# EAGLE board Box-3 Electronics v11 (EAGLE 9.7.0)
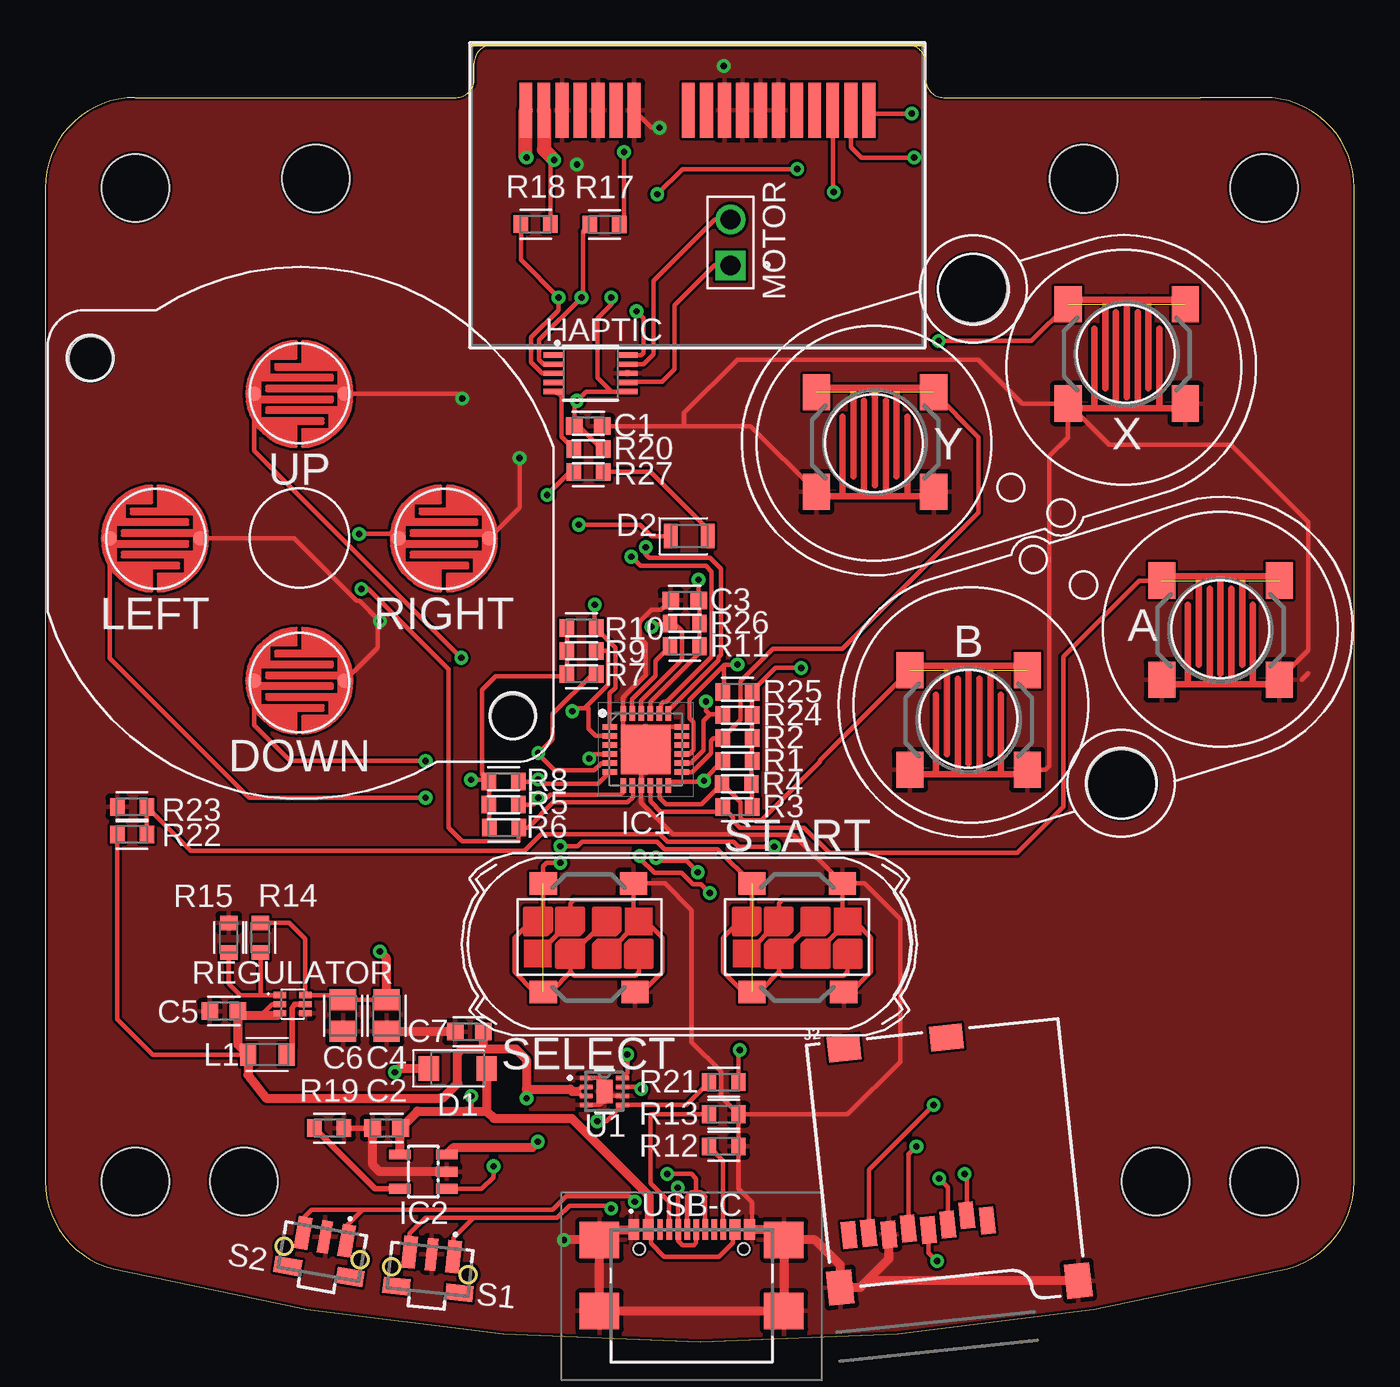
[diagram p0: board, top side]
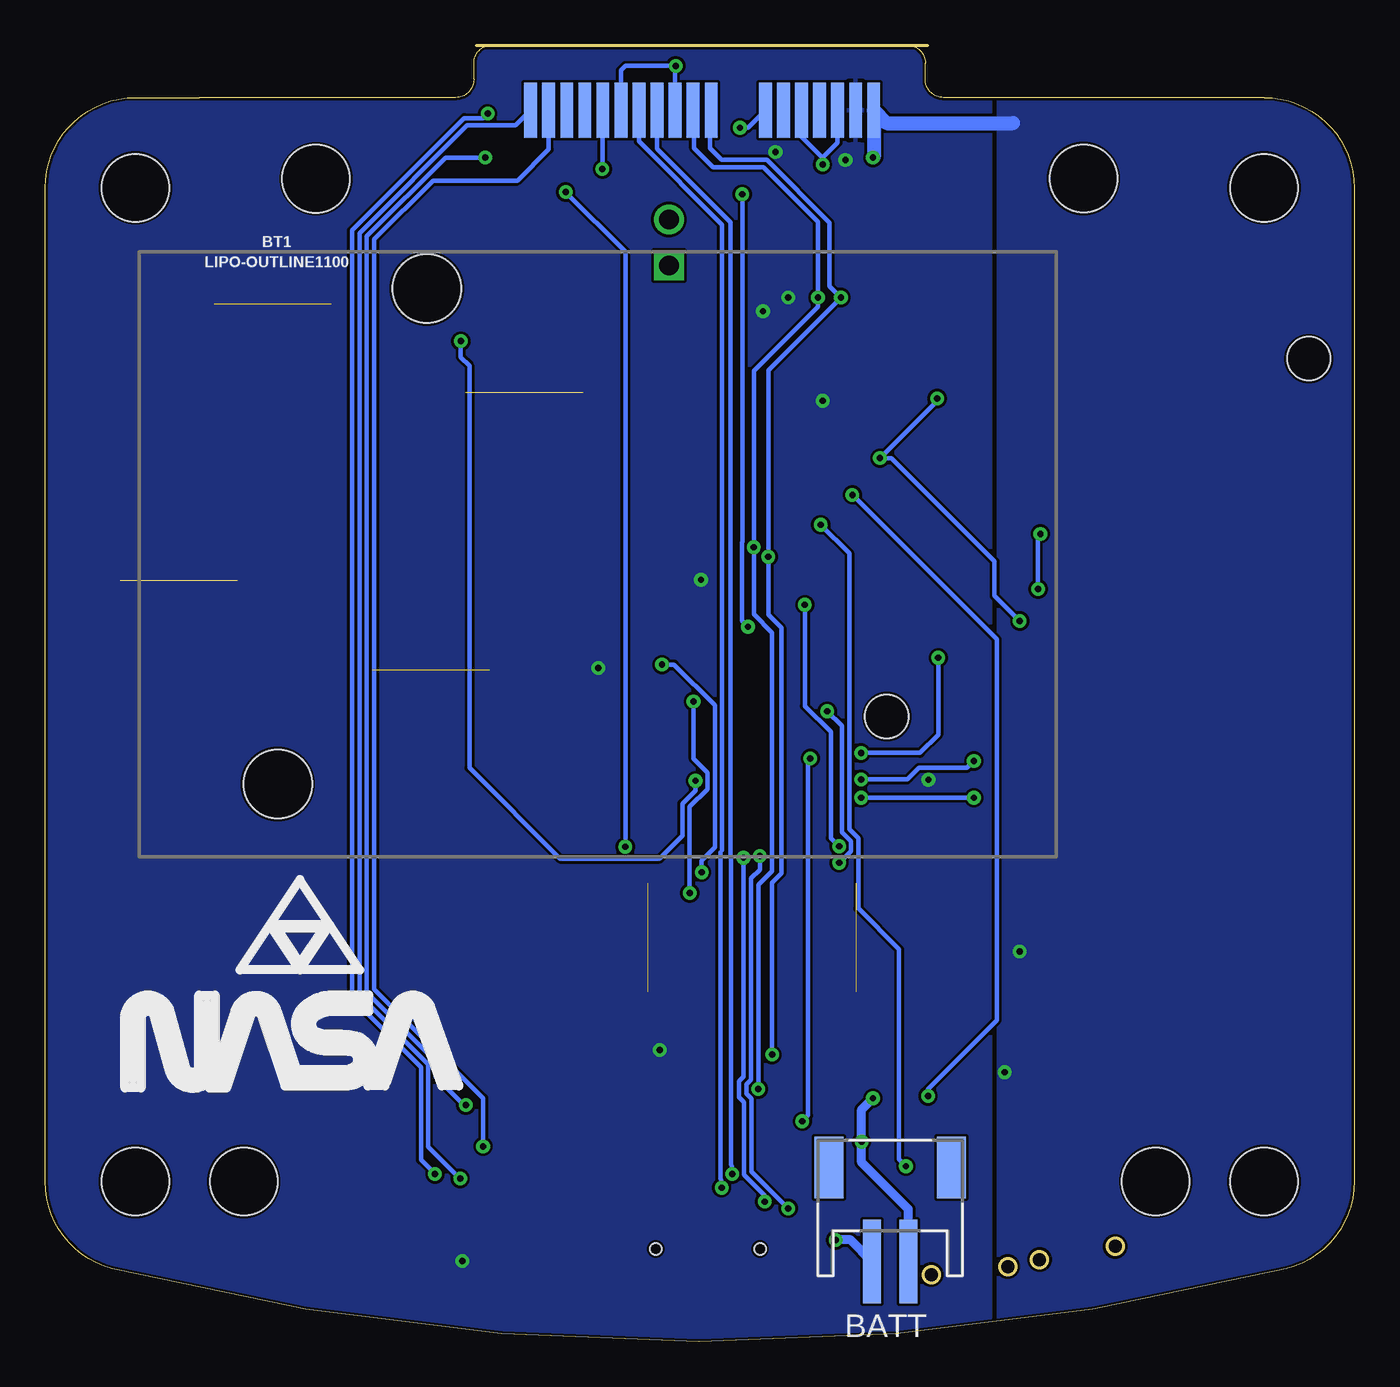
[diagram p1: board, bottom side, seen from below]

Size 72.5 x 71.78 mm. Coordinates in mm from the lower left corner, seen from the top.
Outline: 22.76,68.88 arc90 23.76,69.88 23.76,70.78 arc-90 24.76,71.78 47.88,71.78 arc-83 48.76,70.78 48.76,69.88 arc90 49.76,68.88 63.96,68.88
Outline: 22.76,68.88 5,68.88 arc90 0,63.88 0,8.89 arc76 3.78,4.04 arc28 68.8,4.05 arc75 72.5,8.88 72.5,63.88 arc90 67.5,68.88 63.96,68.88
Outline: 22.76,68.88 22.76,68.88
Outline: 63.96,68.88 63.96,68.88
Outline: circle at 19.2,4.16 radius 0.45
Outline: circle at 23.42,3.72 radius 0.45
Outline: circle at 17.43,4.55 radius 0.45
Outline: circle at 13.25,5.28 radius 0.45
Copper layers (1*16): Top 0.035mm / dielectric 1.5mm / Bottom 0.035mm
Design rules "default *": minimum track width 6mil, minimum drill 0.35mm, track to track 6mil, track to pad 5mil, pad to pad 5mil, via to via 6mil, smd to smd 5mil, copper to edge 6mil, drill to drill 6mil, minimum pad ring 10mil, minimum via ring 8mil, stop-mask expansion 4mil, vias tented up to drill 0mil, thermal gap 10mil
Holes 3.75 mm at 5,63.88 15,64.4 57.5,64.38 67.5,63.87 67.5,8.87 61.5,8.88 5,8.88 11,8.88

## Footprints (pad centres in the part's own frame; a part is rotated, then mirrored left to right if it is on the bottom)
DMG_BTN3 = smd 1.5 x 2: P$1 -3.25,2.75; P$2 -3.25,-2.75; P$3 3.25,2.75; P$4 3.25,-2.75
JSTPH2 = smd 1 x 4.6: 1 -1,-3.7; 2 1,-3.7 | smd 1.6 x 3.4: NC1 -3.4,1.5; NC2 3.4,1.5
CAPC1608X85 = smd 0.921 x 0.97: 1 -0.775,0; 2 0.775,0
CAPC2012X110 = smd 1.165 x 1.465: 1 -0.875,0; 2 0.875,0
SODFL3718X115 = smd 1.115 x 1.361: 1 -1.6,0; 2 1.6,0
LEDC2012X110N_FLAT-R = smd 0.762 x 1.362: A 1.025,0; C -1.025,0
BUTTON-CONDUCTIVE_6MM_2 = smd 0.8 x 0.8: 1 -2.5,0; 2 2.5,0
VSSOP-10 = smd 1.1 x 0.3: 1 -2.05,1; 2 -2.05,0.5; 3 -2.05,0; 4 -2.05,-0.5; 5 -2.05,-1; 6 2.05,-1; 7 2.05,-0.5; 8 2.05,0; 9 2.05,0.5; 10 2.05,1
QFN50P400X400X80-25N = smd 0.8 x 0.3: 1 -2,1.25; 2 -2,0.75; 3 -2,0.25; 4 -2,-0.25; 5 -2,-0.75; 6 -2,-1.25; 13 2,-1.25; 14 2,-0.75; 15 2,-0.25; 16 2,0.25; 17 2,0.75; 18 2,1.25 | smd 0.3 x 0.8: 7 -1.25,-2; 8 -0.75,-2; 9 -0.25,-2; 10 0.25,-2; 11 0.75,-2; 12 1.25,-2; 19 1.25,2; 20 0.75,2; 21 0.25,2; 22 -0.25,2; 23 -0.75,2; 24 -1.25,2 | smd 2.75 x 2.75: 25 0,0
SOT23-5L = smd 0.55 x 1.2: 1 -0.95,-1.3; 2 0,-1.3; 3 0.95,-1.3; 4 0.95,1.3; 5 -0.95,1.3
CONN_5-1734857-1_TEC = smd 0.711 x 3.048: A1 -9.5,0; A2 -8.5,0; A3 -7.5,0; A4 -6.5,0; A5 -5.5,0; A6 -4.5,0; A7 -3.5,0; A8 -2.5,0; A9 -1.5,0; A10 -0.5,0; A11 0.5,0; A12 3.5,0; A13 4.5,0; A14 5.5,0; A15 6.5,0; A16 7.5,0; A17 8.5,0; A18 9.5,0 | smd 0.711 x 3.048 bottom: B1 -9.5,0; B2 -8.5,0; B3 -7.5,0; B4 -6.5,0; B5 -5.5,0; B6 -4.5,0; B7 -3.5,0; B8 -2.5,0; B9 -1.5,0; B10 -0.5,0; B11 0.5,0; B12 3.5,0; B13 4.5,0; B14 5.5,0; B15 6.5,0; B16 7.5,0; B17 8.5,0; B18 9.5,0
MICRO-SD-SOCKET = smd 1.8 x 1.4: CD1 -2.05,0.4; CD2 -7.75,0.4 | smd 0.8 x 1.5: CS -7.84,10.3; DI -6.74,10.7; DO -2.34,10.7; GND -3.44,10.9; RSV1 -8.94,10.7; RSV2 -1.24,10.7; SCLK -4.54,10.7; VCC -5.64,10.9 | smd 1.4 x 1.9: GND1 -13.6,14.55; GND3 -0.45,13.55
INDC2009X120 = smd 0.876 x 1.21: 1 -1.067,0; 2 1.067,0
61300211121 = drill 1.1 square: 1 -1.27,0 | drill 1.1: 2 1.27,0
RESC1608X60 = smd 0.799 x 0.974: 1 -0.815,0; 2 0.815,0
SOT563 = smd 0.7 x 0.35: 1 -0.7,0.5; 2 -0.7,0; 3 -0.7,-0.5; 4 0.7,-0.5; 5 0.7,0; 6 0.7,0.5
TL3340 = smd 0.75 x 1.8: 1 1.225,2.1; 3 -1.225,2.1 | smd 0.6 x 1.8: 2 0,2.1 | smd 1.5 x 0.9: 4 -1.75,0.15; 5 1.75,0.15 | hole 0.9: 2.125,1.2; -2.125,1.2
DMG_BTN1_W2 = smd 1.25 x 1.5: P$1 -3,2.5; P$2 -3,-2.58; P$3 3,2.5; P$4 3,-2.5
21-0168E_T822-3_MXM = smd 0.711 x 0.254: 1 -1.003,0.75; 2 -1.003,0.25; 3 -1.003,-0.25; 4 -1.003,-0.75; 5 1.003,-0.75; 6 1.003,-0.25; 7 1.003,0.25; 8 1.003,0.75 | smd 0.889 x 1.295: 9 0,0
GAMEBOY_COLOR_DPAD_SILK = hole 2.413: -11.557,9.83; 11.811,-9.982
GAMEBOY_COLOR_A/B_BUTTON_MEMBRANE = hole 3.81: 1.524,-6.096
USB4110GFA = smd 0.3 x 1.15: A1 -3.35,3.678; A4 -2.55,3.678; A5 -1.25,3.678; A6 -0.25,3.678; A7 0.25,3.678; A8 1.25,3.678; A9 2.55,3.678; A12 3.35,3.678; B1 3.05,3.678; B4 2.25,3.678; B5 1.75,3.678; B6 0.75,3.678; B7 -0.75,3.678; B8 -1.75,3.678; B9 -2.25,3.678; B12 -3.05,3.678 | smd 2.18 x 2: MP1 -5.11,-0.827; MP2 5.11,-0.827; MP3 -5.11,3.103; MP4 5.11,3.103 | hole 0.65: -2.89,2.603; 2.89,2.603

## Placement (x,y rotation side)
A  SWITCH_MOMENTARYDMG-BTN-A/B  [DMG_BTN3]  65.08,39.39 0 top
B  SWITCH_MOMENTARYDMG-BTN-A/B  [DMG_BTN3]  51.14,34.41 0 top
BATT  JSTPH2  [JSTPH2]  25.7,8.14 0 bottom
BT1  LIPO-OUTLINE1100  [LIPO-1000]  67.3,60.34 270 bottom
C1  .1uF  [CAPC1608X85]  30.09,50.69 0 top
C2  10uF  [CAPC1608X85]  18.91,11.83 180 top
C3  .1uF  [CAPC1608X85]  35.42,41.04 180 top
C4  22uF  [CAPC2012X110]  18.91,18.05 270 top
C5  10uF  [CAPC1608X85]  9.89,18.31 180 top
C6  22uF  [CAPC2012X110]  16.5,18.05 270 top
C7  .1uF  [CAPC1608X85]  23.48,17.16 0 top
D1  MBR0520LT1G  [SODFL3718X115]  22.85,15.13 0 top
D2  LED_RED  [LEDC2012X110N_FLAT-R]  35.67,44.6 0 top
DOWN  SWITCH_MOMENTARYCONTACTIVE_6MM_2  [BUTTON-CONDUCTIVE_6MM_2]  14.08,36.59 0 top
HAPTIC  DRV2605L  [VSSOP-10]  30.21,53.61 0 top
IC1  AW9523BTQR  [QFN50P400X400X80-25N]  33.26,32.78 0 top
IC2  MCP73831/OT  [SOT23-5L]  20.94,9.42 90 top
J1  5-1734857-1CONN_5-1734857-1_TEC  [CONN_5-1734857-1_TEC]  36.12,68.17 180 top
J2  MICRO-SD_CARD_SOCKET  [MICRO-SD-SOCKET]  42.16,16.43 186 top
L1  1uH  [INDC2009X120]  12.3,15.89 0 top
LEFT  SWITCH_MOMENTARYCONTACTIVE_6MM_2  [BUTTON-CONDUCTIVE_6MM_2]  6.08,44.47 0 top
MOTOR  61300211121  [61300211121]  37.96,60.85 90 top
R1  10k  [RESC1608X60]  38.34,32.15 0 top
R2  10k  [RESC1608X60]  38.34,33.42 0 top
R3  10k  [RESC1608X60]  38.34,29.61 0 top
R4  10k  [RESC1608X60]  38.3,30.88 0 top
R5  10k  [RESC1608X60]  25.39,29.74 180 top
R6  10k  [RESC1608X60]  25.41,28.47 180 top
R7  10k  [RESC1608X60]  29.7,36.98 180 top
R8  10k  [RESC1608X60]  25.39,31.01 180 top
R9  10k  [RESC1608X60]  29.7,38.25 180 top
R10  10k  [RESC1608X60]  29.7,39.52 180 top
R11  10k  [RESC1608X60]  35.42,38.5 0 top
R12  5.1k  [RESC1608X60]  37.58,10.81 180 top
R13  5.1k  [RESC1608X60]  37.58,12.59 0 top
R14  732k  [RESC1608X60]  11.92,22.37 90 top
R15  100k  [RESC1608X60]  10.17,22.37 90 top
R17  1k  [RESC1608X60]  30.97,61.85 0 top
R18  1k  [RESC1608X60]  27.16,61.87 0 top
R19  2.0k  [RESC1608X60]  15.73,11.83 180 top
R20  10k  [RESC1608X60]  30.09,49.42 0 top
R21  10k  [RESC1608X60]  37.58,14.37 180 top
R22  10k  [RESC1608X60]  4.81,28.09 0 top
R23  10k  [RESC1608X60]  4.81,29.61 180 top
R24  10k  [RESC1608X60]  38.34,34.69 0 top
R25  10k  [RESC1608X60]  38.34,35.96 0 top
R26  10k  [RESC1608X60]  35.42,39.77 0 top
R27  5.1k  [RESC1608X60]  30.09,48.15 0 top
REGULATOR  TPS61070  [SOT563]  13.7,18.69 0 top
RIGHT  SWITCH_MOMENTARYCONTACTIVE_6MM_2  [BUTTON-CONDUCTIVE_6MM_2]  22.08,44.47 0 top
S1  TL3340AF160QG  [TL3340]  21.18,2.74 354 top
S2  TL3340AF160QG  [TL3340]  15.13,3.73 350 top
SELECT  SWITCH_MOMENTARYDMG-BTN-START/SELECT  [DMG_BTN1_W2]  30.09,22.37 90 top
START  SWITCH_MOMENTARYDMG-BTN-START/SELECT  [DMG_BTN1_W2]  41.64,22.37 90 top
U1  MAX17048G+T1021-0168E_T822-3_MXM  [21-0168E_T822-3_MXM]  30.97,13.86 0 top
U$1  SILKSCREENGBC_D-PAD  [GAMEBOY_COLOR_DPAD_SILK]  14.08,44.6 0 top
U$2  SILKSCREENGBC_START/SELECT  [GAMEBOY_COLOR_START_SELECT_SILK]  35.42,22.37 0 top
U$3  SILKSCREENGBC_A/B  [GAMEBOY_COLOR_A/B_BUTTON_MEMBRANE]  52.89,52.22 180 top
U$4  SILKSCREENGBC_A/B  [GAMEBOY_COLOR_A/B_BUTTON_MEMBRANE]  58.1,36.98 0 top
UP  SWITCH_MOMENTARYCONTACTIVE_6MM_2  [BUTTON-CONDUCTIVE_6MM_2]  14.08,52.47 0 top
USB-C  629722000214  [USB4110GFA]  35.8,2.53 0 top
X  SWITCH_MOMENTARYDMG-BTN-A/B  [DMG_BTN3]  59.9,54.69 0 top
Y  SWITCH_MOMENTARYDMG-BTN-A/B  [DMG_BTN3]  45.95,49.8 0 top

## Library data of the parts
A B DOWN LEFT RIGHT SELECT START U$1-U$4 UP X Y = Inputs
BATT = Tutorial - Fusion 360
BT1 = SparkFun-Batteries; PROD_ID: BATT-13243; SF_SKU: PRT-13813
C1-C3 C5 C7 = Capacitor; CATEGORY: Capacitor
C4 C6 = Capacitor; CATEGORY: Capacitor; MOUSER: https://www.mouser.com/ProductDetail/Samsung-Electro-Mechanics/CL21A226MQQNNNF?qs=sGAEpiMZZMs7ZEmUmaUL0wnmEc5iLKHP2isAklsGkAs%3D
D1 = Diode; CATEGORY: Diode; DESCRIPTION: DIODE SCHOTTKY 20V 500MA SOD123; MANUFACTURER: ON Semiconductor; MPN: MBR0520LT1G; SUB-CATEGORY: Schottky
D2 = LED; CATEGORY: LED; COLOR: RED; DESCRIPTION: CHIP LED FLAT; MANUFACTURER: Wurth Electronik; MOUSER: https://www.mouser.com/ProductDetail/Wurth-Elektronik/150080RS75000?qs=LlUlMxKIyB2jdCo7bnfgew%3D%3D; MPN: 150080RS75000; SUB-CATEGORY: CHIP; TYPE: FLAT_TOP
HAPTIC = SparkFun-IC-Special-Function; PROD_ID: IC-13504
IC1 = ICs; DESCRIPTION: 16 MULTI-FUNCTION LED DRIVER AND GPIO CONTROLLER WITH I2C INTERFACE; HEIGHT: 0.8mm; MANUFACTURER_NAME: AWINIC; MANUFACTURER_PART_NUMBER: AW9523BTQR
IC2 = ICs
J1 = Library; COPYRIGHT: Copyright (C) 2023 Ultra Librarian. All rights reserved.; MANUFACTURER_PART_NUMBER: 5-1734857-1; MFR_NAME: TE Connectivity
J2 = SparkFun-Connectors; PROD_ID: CONN-07820; SF_ID: PRT-00127
L1 = Inductor; CATEGORY: Inductor; MOUSER: https://www.mouser.com/ProductDetail/TDK/MLZ2012A1R0WT000?qs=%2FPzWLGNeQ%252BjNsoWh9l1QhQ%3D%3D; SUB-CATEGORY: Fixed
MOTOR = Headers; CREATED_BY: PCBLayout.com; DIGI_KEY_PART_NUMBER: 732-5315-ND; MANUFACTURER: Wurth Electronics Inc.; MPN: 61300211121
R1-R15 R17-R27 = Tutorial - Fusion 360; CATEGORY: Resistor; SUB-CATEGORY: Fixed
REGULATOR = Library
S1 S2 = Library; DESCRIPTION: E-SWITCH - TL3340AF160QG. - SWITCH, TACTILE SPST 50mA, SMD GULL WING; HEIGHT: mm; MANUFACTURER_NAME: E-Switch; MANUFACTURER_PART_NUMBER: TL3340AF160QG; MOUSER_PART_NUMBER: 612-TL3340AF160QG; MOUSER_PRICE-STOCK: https://www.mouser.co.uk/ProductDetail/E-Switch/TL3340AF160QG?qs=Cv1v43EOJpo402rrfE5MlQ%3D%3D
U1 = ICs; COPYRIGHT: Copyright (C) 2023 Ultra Librarian. All rights reserved.; MANUFACTURER_PART_NUMBER: MAX17048G+T10; MFR_NAME: Analog Devices / Maxim Integrated
USB-C = Wurth_Connectors_WR-USB

## Nets
3V3: C1.1 C3.1 HAPTIC.6 HAPTIC.10 IC1.21 J1.A17 J1.B17 J2.VCC R1.2 R2.2 R3.2 R4.2 R5.2 R6.2 R7.2 R8.2 R9.2 R10.2 R11.2 R17.2 R18.2 R20.2 R21.1 R24.2 R25.2 R26.2
5V: C4.1 C6.1 D1.1 J1.A18 J1.B18 R14.2 REGULATOR.6
!BAT_ALERT: IC1.4 R21.2 U1.5
A: A.P$1 A.P$3 IC1.10 R3.1
B: B.P$1 B.P$3 IC1.11 R4.1
CLK: J1.B2 J2.SCLK
CS: J1.A1 J2.CS
DOWN: DOWN.1 IC1.6 R8.1
GND: A.P$2 A.P$4 B.P$2 B.P$4 BATT.1 C1.2 C2.2 C3.2 C4.2 C5.2 C6.2 C7.1 DOWN.2 HAPTIC.8 IC1.9 IC1.18 IC1.24 IC1.25 IC2.2 J1.A6 J1.A7 J1.A8 J1.A9 J1.A12 J1.A14 J1.A16 J1.B6 J1.B9 J1.B12 J1.B14 J1.B16 J2.GND J2.GND1 J2.GND3 LEFT.2 R12.1 R13.2 R15.2 R19.1 R23.2 REGULATOR.4 RIGHT.2 S1.2 S2.2 SELECT.P$2 SELECT.P$4 START.P$2 START.P$4 U1.1 U1.4 U1.6 U1.9 UP.2 USB-C.A1 USB-C.A12 USB-C.B1 USB-C.B12 USB-C.MP1 USB-C.MP2 USB-C.MP3 USB-C.MP4 X.P$2 X.P$4 Y.P$2 Y.P$4
GPIO_INTN: IC1.22 J1.B5 R26.1
IO9: J1.A4
IO38: J1.A11
IO39: J1.A10
IO42: J1.A5
IO43: J1.B3
IO44: J1.B4
LEFT: IC1.7 LEFT.1 R5.1
M+: HAPTIC.7 MOTOR.1
M-: HAPTIC.9 MOTOR.2
N$32: J1.A13
N$33: J1.B13
N$36: J1.A15
N$37: J1.B15
N$81: R12.2 USB-C.B5
N$82: R13.1 USB-C.A5
N$83: R14.1 R15.1 REGULATOR.1
N$84: L1.2 REGULATOR.5
N$85: IC2.5 R19.2
N$86: HAPTIC.5 R20.1
N$87: IC1.23 R11.1
N$88: D2.A R27.2
RIGHT: IC1.8 R6.1 RIGHT.1
SCK: HAPTIC.2 IC1.19 J1.B10 R17.1 U1.7
SDA: HAPTIC.3 IC1.20 J1.B11 R18.1 U1.8
SELECT: IC1.2 R9.1 SELECT.P$1 SELECT.P$3
SI: J1.B1 J2.DI
SO: J1.A2 J2.DO
START: IC1.1 R10.1 START.P$1 START.P$3
STAT2: D2.C IC2.1
UP: IC1.5 R7.1 UP.1
USB_D+: J1.B8 USB-C.A6 USB-C.B6
USB_D-: J1.B7 USB-C.A7 USB-C.B7
VBAT: BATT.2 C5.1 C7.2 IC2.3 L1.1 R22.1 REGULATOR.2 REGULATOR.3 U1.2 U1.3
VBAT_SENSE: J1.A3 R22.2 R23.1
VBUS: C2.1 D1.2 IC2.4 R27.1 USB-C.A4 USB-C.A9 USB-C.B4 USB-C.B9
VOLUME_DOWN: IC1.15 R25.1 S2.1 S2.3
VOLUME_UP: IC1.14 R24.1 S1.1 S1.3
X: IC1.12 R1.1 X.P$1 X.P$3
Y: IC1.13 R2.1 Y.P$1 Y.P$3

## Tracks (layer width: path | path; a pad name or v marks a point on that pad's centre or on a via)
3V3  (via drill 0.35)
  Top 0.254: R18.2 27.98,65.22 v28.18,65.42 | v49.39,4.46 48.91,4.94 J2.VCC | IC1.21 33.51,35.42 36.17,38.08 36.17,38.44 R11.2 R26.2 36.23,41 C3.1 36.18,41.05 v36.18,42.18 | R6.2 24.59,29.13 24.57,29.15 R5.2 R8.2 | R8.2 24.19,31.39 24.19,36.09 24.95,36.85 28.76,36.85 R7.2 R9.2 R10.2 | R3.2 39.16,30.84 R4.2 39.11,32.11 R1.2 R2.2 R24.2 R25.2 39.16,36.01 40.44,37.3 v41.87,37.3 | R8.2 24.47,31.11 v23.59,31.11 | R21.1 38.39,16.07 v38.47,16.15 | HAPTIC.6 32.23,52.58 31.74,52.58 31.37,52.58 | 31.37,52.58 30.59,53.36 30.59,56.66 31.35,57.42 v31.35,57.8 | HAPTIC.10 32.99,54.61 33.13,54.76 33.13,56.66 v32.75,57.04 | R20.2 30.83,49.42 29.55,50.69 C1.1 29.31,51.95 v29.45,52.09 29.94,52.58 31.37,52.58 | R17.2 32.05,62.11 v32.05,65.87
  Top 0.762: J1.B17 27.62,65.99 v28.18,65.42
  pour Bottom: 20.18,-1 73.27,-1 73.27,71.65 20.18,71.65
5V  (via drill 0.35)
  Top 0.254: R14.2 13.52,23.19 14.4,22.31 REGULATOR.6 16.46,19.19 C6.1 C4.1
  Top 0.508: C4.1 18.91,21.23 v18.53,21.61 | v19.37,14.92 19.59,15.13 D1.1
  Top 0.762: v26.66,65.55 26.62,65.59 J1.B18
  Bottom 0.762: 18.91,67.46 25.9,67.46 J1.B18 26.62,65.59 v26.66,65.55
  pour Bottom: -0.14,-1 19.67,-1 19.67,68.73 -0.14,68.73
!BAT_ALERT  (via drill 0.35)
  Top 0.254: IC1.4 30.37,32.53 v30.13,32.29 | R21.2 35.51,13.11 U1.5 31.08,12.21 v30.57,12.21
  Bottom 0.254: v30.13,32.29 30.25,32.29 30.25,12.53 v30.57,12.21
A  (1 unrouted)
  Top 0.254: IC1.10 33.51,29.92 34.09,29.34 37.52,29.34 R3.1 38.09,29.04 38.09,28.85 38.48,28.46 39.93,28.46 39.93,28.47 42.03,28.47 43.44,27.07 53.83,27.07 56.37,29.61 56.37,37.93 60.59,42.14 A.P$1
B  (1 unrouted)
  Top 0.254: IC1.11 34.01,30.12 34.38,29.75 36.35,29.75 R4.1 38.01,30.35 38.03,30.35 38.5,29.88 38.5,29.02 38.65,28.87 39.66,28.87 42.91,32.12 42.91,32.19 B.P$1
CLK  (via drill 0.35)
  Top 0.254: v48.25,10.81 47.8,10.37 J2.SCLK
  Bottom 0.254: v48.25,10.81 48.25,13.48 54.28,19.52 54.28,61.02 51.03,64.28 46.34,64.28 44.62,66.01 J1.B2
CS  (via drill 0.35)
  Top 0.254: v50.91,9.29 51.04,9.16 J2.CS | v47.99,67.99 45.8,67.99 J1.A1
  Bottom 0.254: v50.91,9.29 51.69,10.07 51.69,15.2 55.5,19.01 55.5,61.53 49.3,67.73 48.24,67.73 v47.99,67.99
DOWN  (via drill 0.35)
  Top 0.254: 27.42,31.13 27.29,31.01 R8.1 | 27.42,31.13 27.67,30.88 30.62,30.88 30.62,30.9 IC1.6 | DOWN.1 11.58,34.14 13.57,32.15 v21.07,32.15 | 27.42,31.13 v27.32,31.13
  Bottom 0.254: v21.07,32.15 21.45,31.77 24.12,31.77 24.75,31.13 v27.32,31.13
GND  (via drill 0.35)
  Top 0.254: J1.B6 | v34.02,67.2 33.59,67.2 J1.B12 | R13.2 R12.1 38.39,8.47 39.15,7.72 USB-C.A12 | v26.27,48.91 26.27,46.16 RIGHT.2 | v23.1,52.22 22.85,52.47 UP.2 | DOWN.2 18.4,38.41 18.4,39.77 v18.53,39.9 17.41,41.02 17.24,41.02 13.79,44.47 LEFT.2 | IC1.18 34.51,34.03 IC1.25 | IC1.25 32.01,34.03 IC1.24 32.01,35.67 33.25,36.91 33.25,38.67 32.92,39 32.92,39.85 33.58,40.51 34.12,40.51 C3.2 | IC1.25 33.01,32.53 IC1.9 33.01,29.84 34.77,28.09 38.28,28.09 38.31,28.06 40.09,28.06 40.1,28.06 41.45,28.06 START.P$4 45.37,25.37 47.36,23.39 47.36,15.51 44.44,12.59 R13.2 | SELECT.P$4 34.32,25.37 35.8,23.89 35.8,16.58 37.42,14.96 37.42,13.57 R13.2 | 69.96,37.02 69.58,36.64 | Y.P$2 39.06,50.69 35.38,50.69 | 56.5,51.94 X.P$2 58.94,49.65 65.67,49.65 69.96,45.36 69.96,38.27 A.P$4 | 56.5,51.94 54.11,51.94 51.67,54.37 38.34,54.37 35.38,51.42 35.38,50.69 | 31.22,13.61 30.97,13.61 31.1,13.48 30.73,13.11 U1.4 | 31.22,13.61 U1.6 | 31.22,13.61 U1.9 30.96,14.22 30.57,14.61 U1.1 | C1.2 35.38,50.69 | USB-C.A1 USB-C.B12 | B.P$4 55.38,31.66 55.61,31.9 55.61,49.04 56.63,50.06 56.63,51.81 56.5,51.94
  Top 0.305: C2.2 R19.1
  Top 0.508: 40.91,5.37 | 40.91,5.37 USB-C.MP4 | 40.91,5.37 USB-C.MP2 USB-C.MP1 USB-C.MP3 | USB-C.MP3 31.27,6.21 USB-C.A1 | USB-C.MP3 v28.72,5.64 | USB-C.MP4 40.34,6.21 USB-C.A12 | 45.52,3.38 46.73,4.59 J2.GND | 45.52,3.38 45.13,3 J2.GND3 44.03,4.24 42.63,5.64 USB-C.MP4 | J2.GND1 45.52,3.38 | IC2.2 18.53,9.42 18.13,9.81 C2.2 | C7.1 18.92,17.16 C4.2
  Bottom 0.254: J1.B12 33.59,67.2 v34.02,67.2 | v23.1,52.22 23.04,52.15 v26.27,48.91 25.64,48.91 19.92,43.2 19.92,41.29 v18.53,39.9 | J1.B16 28.62,66.38 29.45,65.55 | 29.45,65.55 v29.45,65.17 | J1.B14 30.62,66.72 29.45,65.55 | J1.B9 37.62,70.59 | 37.62,70.59 v37.58,70.63 | J1.B6 40.62,70.39 40.37,70.63 37.66,70.63 37.62,70.59
  Bottom 0.508: BATT.1 27.9,5.64 v28.72,5.64
  pour Top: -0.14,-1 73.27,-1 73.27,71.65 -0.14,71.65
GPIO_INTN  (via drill 0.35)
  Top 0.254: IC1.22 33.01,35.49 35.26,37.74 35.26,39.35 34.83,39.77 R26.1 34.54,39.71 33.7,39.71 v33.58,39.58 | v33.9,63.52 35.29,64.92 v41.64,64.92
  Bottom 0.254: v33.9,63.52 33.9,44.28 33.92,44.26 33.92,39.92 v33.58,39.58 | v33.58,39.58 | v41.64,64.92 41.64,68.14 J1.B5
LEFT  (via drill 0.35)
  Top 0.254: LEFT.1 3.58,37.82 11.29,30.12 v21.07,30.12 | R5.1 26.92,29.74 26.94,29.76 27.06,29.76 27.42,30.12 | 27.42,30.12 27.81,30.12 27.96,30.27 31.88,30.27 32.01,30.4 IC1.7 | v27.32,30.12 27.42,30.12
  Bottom 0.254: v21.07,30.12 v27.32,30.12
M+
  Top 0.254: MOTOR.1 37.07,59.58 34.85,57.37 34.85,53.82 34.17,53.14 32.36,53.14 HAPTIC.7
M-
  Top 0.254: MOTOR.2 37.07,62.12 33.69,58.74 33.69,54.67 33.13,54.11 HAPTIC.9
N$81
  Top 0.254: R12.2 37.55,10.03 USB-C.B5
N$82
  Top 0.254: R13.1 33.51,12.59 33.51,8.78 34.55,7.75 USB-C.A5
N$83
  Top 0.254: R15.1 10.17,19.81 10.79,19.19 11.92,19.19 | 11.92,19.19 REGULATOR.1 | R14.1 11.92,19.19
N$84
  Top 0.254: REGULATOR.5 14.33,18.69
  Top 0.305: L1.2 13.67,16.19 13.67,18.47 13.82,18.69 14.33,18.69
N$85
  Top 0.305: R19.2 18.28,8.47 IC2.5
N$86
  Top 0.254: R20.1 28.6,50.1 28.6,52.38 HAPTIC.5
N$87
  Top 0.254: R11.1 33.81,37.71 33.81,36.87 32.51,35.57 IC1.23
N$88
  Top 0.254: D2.A 36.7,44.97 33.51,48.15 R27.2
RIGHT  (via drill 0.35)
  Top 0.254: v17.51,41.67 17.89,41.67 22.34,37.23 22.34,28.47 23.1,27.7 26.22,27.7 R6.1 26.73,28.47 28.13,29.86 32.25,29.86 32.54,30.15 32.54,30.75 IC1.8 | v17.38,44.72 19.33,44.72 RIGHT.1
  Bottom 0.254: v17.51,41.67 17.51,44.6 v17.38,44.72
SCK  (via drill 0.35)
  Top 0.254: R17.1 29.78,61.47 29.78,57.88 v29.7,57.8 27.36,55.46 27.36,54.36 27.6,54.11 HAPTIC.2 | v33.26,43.98 33.26,43.6 33.45,43.41 36.83,43.41 37.43,42.8 37.43,38.04 37.29,37.9 37.29,37.74 34.51,34.96 IC1.19 | v33.01,13.99 32.88,14.11 U1.7
  Bottom 0.254: v33.01,13.99 33.01,25.29 32.24,26.05 32.24,39.26 33.26,40.28 v33.26,43.98 33.24,44 33.24,53.76 29.7,57.3 v29.7,57.8 29.7,62.01 32.71,65.02 35.52,65.02 36.56,66.06 36.56,68.12 J1.B10
SDA  (via drill 0.35)
  Top 0.254: R18.1 26.35,59.89 v28.43,57.8 28.43,57.11 26.92,55.6 26.92,54.22 27.53,53.61 HAPTIC.3 | v32.46,43.45 32.96,42.94 36.59,42.94 36.91,42.63 36.91,38.09 36.89,38.07 36.89,37.91 34.42,35.44 34.26,35.44 34.1,35.29 34.1,34.88 IC1.20 | v32.24,15.89 32.24,14.88 U1.8
  Bottom 0.254: v32.24,15.89 32.24,25.42 31.74,25.93 31.74,39.52 32.46,40.24 v32.46,43.45 32.46,53.78 v28.43,57.8 29.07,58.44 29.07,61.95 32.54,65.42 35.04,65.42 35.67,66.06 35.67,68.11 J1.B11
SELECT  (via drill 0.35)  (1 unrouted)
  Top 0.254: IC1.2 30.47,33.53 30.08,33.92 30.08,35.07 29.86,35.07 | 29.86,35.07 31.17,36.38 31.17,38.25 R9.1 | SELECT.P$3 27.59,26.32 27.78,26.52 v28.54,26.52 | v29.19,34.91 29.35,35.07 29.86,35.07
  Bottom 0.254: v29.19,34.91 28.38,34.09 28.38,28.2 27.88,27.7 27.88,27.16 28.26,26.77 28.28,26.77 v28.54,26.52
SI  (via drill 0.35)
  Top 0.254: v49.52,9.04 49.99,8.57 J2.DI
  Bottom 0.254: v49.52,9.04 51.29,10.81 51.29,15.37 55.1,19.18 55.1,61.36 49.13,67.33 46.46,67.33 J1.B1
SO  (via drill 0.35)
  Top 0.254: v49.2,13.1 45.63,9.52 45.63,6.05 J2.DO | v48.12,65.55 45.2,65.55 44.62,66.13 J1.A2
  Bottom 0.254: v49.2,13.1 49.3,13.1 50.88,14.68 50.88,15.54 54.69,19.35 54.69,61.19 50.33,65.55 v48.12,65.55
START  (via drill 0.35)  (1 unrouted)
  Top 0.254: R10.1 30.43,39.61 v30.43,40.79 30.43,39.58 31.58,38.43 31.58,36.22 31.26,35.9 IC1.1 | v28.54,27.43 29.49,27.43 29.74,27.68 33.88,27.68 34.28,27.27 37.24,27.27 START.P$3
  Bottom 0.254: v30.43,40.79 30.43,35.19 28.99,33.76 28.99,27.89 v28.54,27.43
STAT2  (via drill 0.35)
  Top 0.254: D2.C 33.58,44.6 32.94,45.23 v29.55,45.23 | v24.83,9.72 24.83,9.12 24.18,8.47 IC2.1
  Bottom 0.254: v24.83,9.72 25.21,10.1 25.21,21.73 27.47,23.99 27.47,27.87 27.97,28.37 27.97,43.65 v29.55,45.23
UP  (via drill 0.35)
  Top 0.254: UP.1 11.58,49.32 v23.04,37.86 | 27.35,32.59 27.35,32.48 28.2,31.63 30.4,31.63 30.8,32.03 IC1.5 | R7.1 30.33,36.98 28.11,34.75 28.11,33.35 27.35,32.59 | v27.32,32.59 27.35,32.59
  Bottom 0.254: v23.04,37.86 23.04,33.61 24.05,32.59 v27.32,32.59
USB_D+  (via drill 0.35)
  Top 0.254: 36.05,8.27 35.8,8.27 35.55,8.02 USB-C.A6 | 36.05,8.27 36.31,8.27 36.56,8.02 36.55,8.01 USB-C.B6 | 36.05,8.27 36.05,9.04 35.8,9.29 v34.45,9.29
  Bottom 0.254: v34.45,9.29 34.45,9.72 34.53,9.8 34.53,26.77 34.55,26.8 34.55,61.97 38.62,66.04 J1.B8
USB_D-  (via drill 0.35)
  Top 0.254: v35.04,8.53 v35.05,8.52 USB-C.B7 35.05,5.59 35.29,5.35 35.93,5.35 36.05,5.48 USB-C.A7
  Bottom 0.254: v35.04,8.53 35.04,8.95 35.11,9.02 35.11,27.1 35.01,27.2 35.01,61.84 39.62,66.45 J1.B7
VBAT  (via drill 0.35)
  Top 0.254: 10.92,18.05 C5.1 | REGULATOR.2 12.56,18.69 11.92,18.05 | L1.1 5.95,15.89 4,17.85 R22.1 | U1.2 29.7,14.11 29.45,13.86 29.7,13.61 U1.3
  Top 0.305: REGULATOR.3 12.87,18.05
  Top 0.508: v27.29,11.07 26.98,10.76 22.63,10.76 IC2.3 | 24.24,16.22 23.09,16.22 22.85,15.98 22.85,14.32 22.01,13.48 12.23,13.48 11.24,14.76 L1.1 10.67,16.46 C5.1 | 24.24,16.22 26.06,16.22 26.66,15.62 26.66,13.99 | 10.92,18.05 11.92,18.05 12.87,18.05 | 26.66,13.99 v26.66,13.48 | 26.66,13.99 29.07,13.99 29.2,13.86 29.45,13.86 | C7.2 24.26,16.23 24.24,16.22
  Bottom 0.508: BATT.2 24.7,7.34 27.29,9.92 v27.29,11.07 27.29,12.85 v26.66,13.48
VBAT_SENSE  (via drill 0.35)
  Top 0.254: R22.2 R23.1 8.06,27.17 26.55,27.17 27.46,28.09 34.05,28.09 34.45,27.68 38.12,27.68 38.39,27.4 v40.37,27.4 | v43.67,63.65 43.62,63.7 J1.A3
  Bottom 0.254: v40.37,27.4 40.37,60.34 v43.67,63.65
VBUS  (via drill 0.35)
  Top 0.254: 33.38,6.34 USB-C.A4 USB-C.B9 33.55,5.44 34.28,4.72 37.32,4.72 38.09,5.48 38.09,6.17 | 38.09,6.17 USB-C.B4 | USB-C.A9 38.31,6.17 38.09,6.17 | 23.35,12.77 23.61,13.02 v23.61,13.61 | v27.8,46.88 29.07,48.15 R27.1
  Top 0.508: D1.2 24.45,12.77 | 24.45,12.77 24.85,12.36 29.16,12.36 33.44,8.08 33.44,6.4 33.38,6.34 | IC2.4 19.64,11.79 C2.1 20.62,12.77 23.35,12.77 24.45,12.77
  Bottom 0.254: v23.61,13.61 23.61,13.99 19.8,17.8 19.8,38.88 v27.8,46.88
VOLUME_DOWN  (via drill 0.35)
  Top 0.254: 17.59,7.3 28.1,7.3 28.84,8.04 32.37,8.04 v32.66,7.75 | IC1.15 35.67,32.53 35.91,32.78 35.91,34.29 35.68,34.52 35.68,35.55 37.61,37.48 v38.34,37.48 37.62,37.48 37.59,37.45 37.59,36.02 R25.1 | v36.15,25.99 35.52,26.62 34.01,26.62 v33.83,26.8 | S2.1 16.7,6.42 17.59,7.3 | S2.3 14.29,6.83 14.76,7.3 17.59,7.3
  Bottom 0.254: v38.34,37.48 37.66,37.48 35.42,35.24 35.42,27.36 36.15,26.64 v36.15,25.99 | v32.66,7.75 32.66,8.11 33.79,9.25 33.79,13.27 34.07,13.55 34.07,14.43 33.83,14.67 v33.83,26.8
VOLUME_UP  (via drill 0.35)
  Top 0.254: v31.35,7.38 31.2,7.54 29.03,7.54 28.35,6.86 23.72,6.86 | IC1.14 35.74,32.03 36.47,32.76 36.47,34.37 36.83,34.73 | v36.8,24.85 36.32,25.33 35.88,25.33 35.25,25.96 33.73,25.96 32.92,26.77 v32.92,26.89 | v36.59,35.44 36.59,34.93 36.8,34.73 36.83,34.73 | R24.1 37.48,34.73 36.83,34.73 | 23.72,6.86 22.62,5.76 S1.1 | S1.3 20.18,5.99 21.06,6.86 23.72,6.86
  Bottom 0.254: v31.35,7.38 33.39,9.42 33.39,13.44 33.66,13.72 33.66,14.26 33.41,14.51 33.41,25.65 32.92,26.14 v32.92,26.89 | v36.59,35.44 36.59,32.27 35.83,31.5 35.83,30.6 36.8,29.62 v36.8,24.85
X  (via drill 0.35)  (1 unrouted)
  Top 0.254: v49.48,55.39 49.49,55.4 54.62,55.4 X.P$1 | R1.1 37.51,32.15 36.47,31.11 36.47,31.04 | IC1.12 34.73,31.01 36.47,31.01 36.47,31.04 | 36.47,31.04 v36.48,31.05
  Bottom 0.254: v49.48,55.39 49.48,54.5 49.01,54.03 49.01,31.77 43.98,26.74 38.47,26.74 37.21,28.01 37.21,29.79 36.48,30.51 v36.48,31.05
Y  (1 unrouted)
  Top 0.254: Y.P$3 51.67,50.08 51.67,45.88 44.14,38.35 40.3,38.35 38.5,36.55 38.5,34.42 37.52,33.44 R2.1 37.02,33.42 36.87,33.27 36.87,32.59 35.82,31.53 IC1.13